# EAGLE board ultrainocopy (EAGLE 8.3.2)
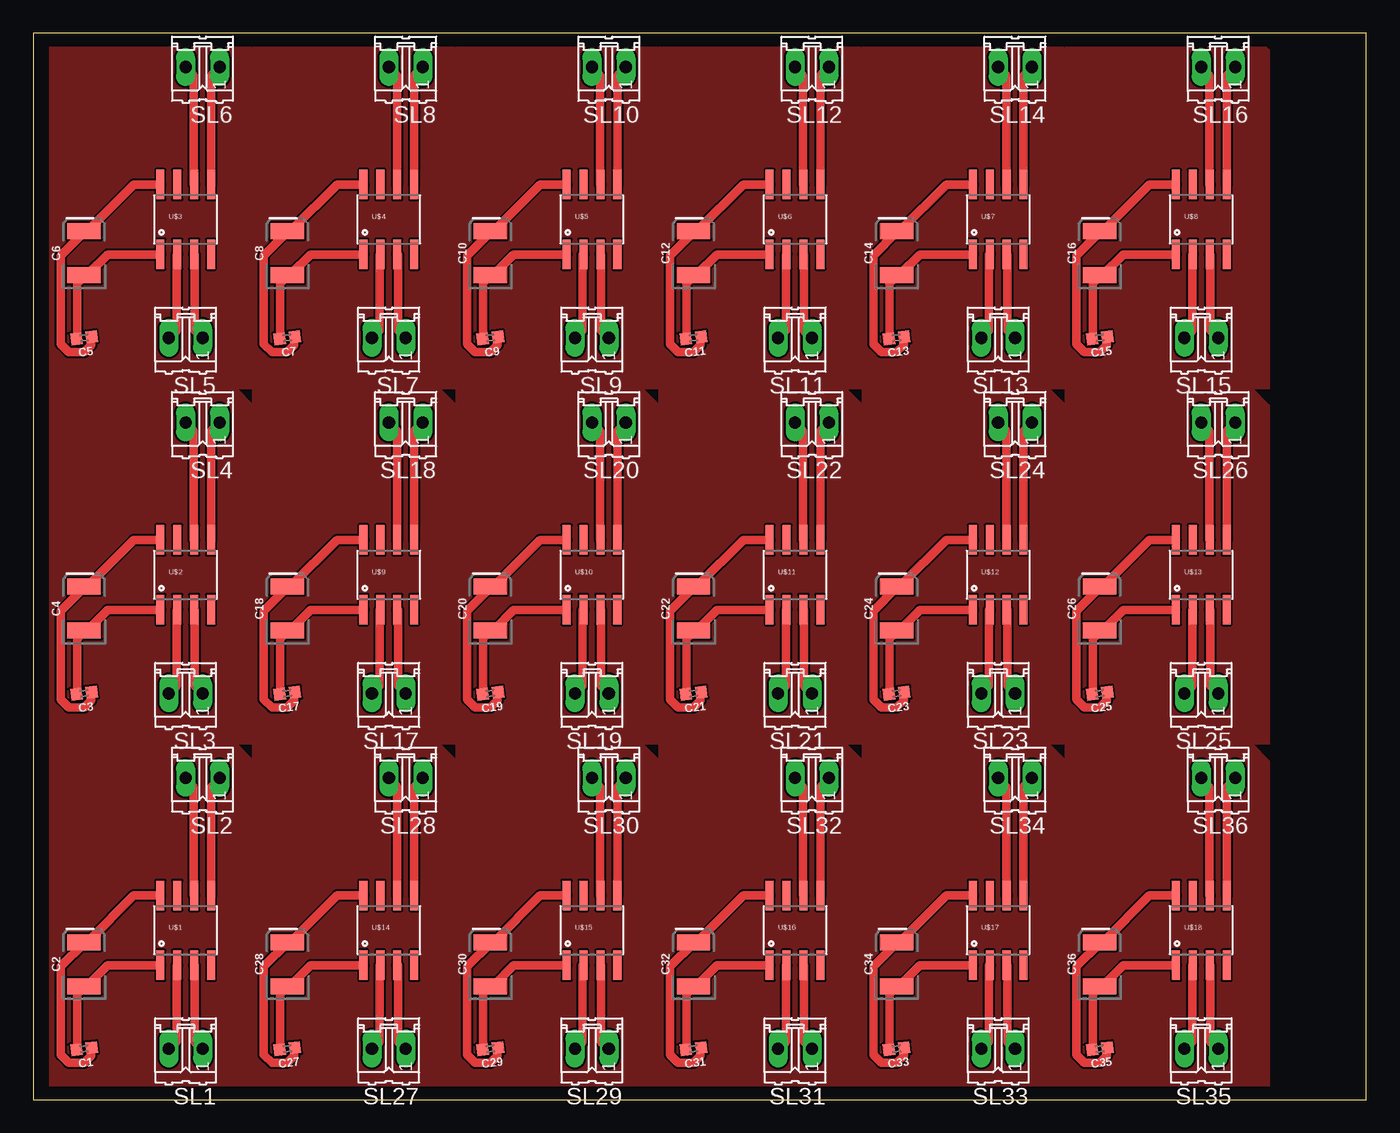
[diagram p0: board, top side]

Size 100 x 80 mm. Coordinates in mm from the lower left corner, seen from the top.
Outline: 0,0 100,0 100,80 0,80 0,0
Copper layers (1*16): Top 0.035mm / dielectric 1.5mm / Bottom 0.035mm
Design rules "default": minimum track width 6mil, minimum drill 0.35mm, track to track 6mil, track to pad 6mil, pad to pad 6mil, via to via 6mil, smd to smd 6mil, copper to edge 40mil, drill to drill 6mil, minimum pad ring 10mil, minimum via ring 8mil, stop-mask expansion 4mil, vias tented up to drill 0mil, thermal gap 10mil
Net classes: 1 GND: width 0.635 mm

## Footprints (pad centres in the part's own frame; a part is rotated, then mirrored left to right if it is on the bottom)
0402 = smd 0.85 x 0.9: 1 -0.58,0; 2 0.58,0
EIA3528 = smd 1.2 x 2.5: A 1.65,0; C -1.65,0
02P = drill 0.914 long: 1 -1.27,0; 2 1.27,0
SOIC-8 = smd 0.61 x 2.21: 1 -1.905,-2.616; 2 -0.635,-2.616; 3 0.635,-2.616; 4 1.905,-2.616; 5 1.905,2.616; 6 0.635,2.616; 7 -0.635,2.616; 8 -1.905,2.616

## Placement (x,y rotation side)
C1  0.1uF  [0402]  3.81,3.81 187.1 top
C2  47uF  [EIA3528]  3.81,10.16 90 top
C3  0.1uF  [0402]  3.81,30.48 187.1 top
C4  47uF  [EIA3528]  3.81,36.83 90 top
C5  0.1uF  [0402]  3.81,57.15 187.1 top
C6  47uF  [EIA3528]  3.81,63.5 90 top
C7  0.1uF  [0402]  19.05,57.15 187.1 top
C8  47uF  [EIA3528]  19.05,63.5 90 top
C9  0.1uF  [0402]  34.29,57.15 187.1 top
C10  47uF  [EIA3528]  34.29,63.5 90 top
C11  0.1uF  [0402]  49.53,57.15 187.1 top
C12  47uF  [EIA3528]  49.53,63.5 90 top
C13  0.1uF  [0402]  64.77,57.15 187.1 top
C14  47uF  [EIA3528]  64.77,63.5 90 top
C15  0.1uF  [0402]  80.01,57.15 187.1 top
C16  47uF  [EIA3528]  80.01,63.5 90 top
C17  0.1uF  [0402]  19.05,30.48 187.1 top
C18  47uF  [EIA3528]  19.05,36.83 90 top
C19  0.1uF  [0402]  34.29,30.48 187.1 top
C20  47uF  [EIA3528]  34.29,36.83 90 top
C21  0.1uF  [0402]  49.53,30.48 187.1 top
C22  47uF  [EIA3528]  49.53,36.83 90 top
C23  0.1uF  [0402]  64.77,30.48 187.1 top
C24  47uF  [EIA3528]  64.77,36.83 90 top
C25  0.1uF  [0402]  80.01,30.48 187.1 top
C26  47uF  [EIA3528]  80.01,36.83 90 top
C27  0.1uF  [0402]  19.05,3.81 187.1 top
C28  47uF  [EIA3528]  19.05,10.16 90 top
C29  0.1uF  [0402]  34.29,3.81 187.1 top
C30  47uF  [EIA3528]  34.29,10.16 90 top
C31  0.1uF  [0402]  49.53,3.81 187.1 top
C32  47uF  [EIA3528]  49.53,10.16 90 top
C33  0.1uF  [0402]  64.77,3.81 187.1 top
C34  47uF  [EIA3528]  64.77,10.16 90 top
C35  0.1uF  [0402]  80.01,3.81 187.1 top
C36  47uF  [EIA3528]  80.01,10.16 90 top
SL1  [02P]  11.43,3.81 180 top
SL2  [02P]  12.7,24.13 180 top
SL3  [02P]  11.43,30.48 180 top
SL4  [02P]  12.7,50.8 180 top
SL5  [02P]  11.43,57.15 180 top
SL6  [02P]  12.7,77.47 180 top
SL7  [02P]  26.67,57.15 180 top
SL8  [02P]  27.94,77.47 180 top
SL9  [02P]  41.91,57.15 180 top
SL10  [02P]  43.18,77.47 180 top
SL11  [02P]  57.15,57.15 180 top
SL12  [02P]  58.42,77.47 180 top
SL13  [02P]  72.39,57.15 180 top
SL14  [02P]  73.66,77.47 180 top
SL15  [02P]  87.63,57.15 180 top
SL16  [02P]  88.9,77.47 180 top
SL17  [02P]  26.67,30.48 180 top
SL18  [02P]  27.94,50.8 180 top
SL19  [02P]  41.91,30.48 180 top
SL20  [02P]  43.18,50.8 180 top
SL21  [02P]  57.15,30.48 180 top
SL22  [02P]  58.42,50.8 180 top
SL23  [02P]  72.39,30.48 180 top
SL24  [02P]  73.66,50.8 180 top
SL25  [02P]  87.63,30.48 180 top
SL26  [02P]  88.9,50.8 180 top
SL27  [02P]  26.67,3.81 180 top
SL28  [02P]  27.94,24.13 180 top
SL29  [02P]  41.91,3.81 180 top
SL30  [02P]  43.18,24.13 180 top
SL31  [02P]  57.15,3.81 180 top
SL32  [02P]  58.42,24.13 180 top
SL33  [02P]  72.39,3.81 180 top
SL34  [02P]  73.66,24.13 180 top
SL35  [02P]  87.63,3.81 180 top
SL36  [02P]  88.9,24.13 180 top
U$1  TC4427  [SOIC-8]  11.43,12.7 0 top
U$2  TC4427  [SOIC-8]  11.43,39.37 0 top
U$3  TC4427  [SOIC-8]  11.43,66.04 0 top
U$4  TC4427  [SOIC-8]  26.67,66.04 0 top
U$5  TC4427  [SOIC-8]  41.91,66.04 0 top
U$6  TC4427  [SOIC-8]  57.15,66.04 0 top
U$7  TC4427  [SOIC-8]  72.39,66.04 0 top
U$8  TC4427  [SOIC-8]  87.63,66.04 0 top
U$9  TC4427  [SOIC-8]  26.67,39.37 0 top
U$10  TC4427  [SOIC-8]  41.91,39.37 0 top
U$11  TC4427  [SOIC-8]  57.15,39.37 0 top
U$12  TC4427  [SOIC-8]  72.39,39.37 0 top
U$13  TC4427  [SOIC-8]  87.63,39.37 0 top
U$14  TC4427  [SOIC-8]  26.67,12.7 0 top
U$15  TC4427  [SOIC-8]  41.91,12.7 0 top
U$16  TC4427  [SOIC-8]  57.15,12.7 0 top
U$17  TC4427  [SOIC-8]  72.39,12.7 0 top
U$18  TC4427  [SOIC-8]  87.63,12.7 0 top

## Library data of the parts
C1 C3 C5 C7 C9 C11 C13 C15 C17 C19 C21 C23 C25 C27 C29 C31 C33 C35 = capacitor; PROD_ID: CAP-12416
C2 C4 C6 C8 C10 C12 C14 C16 C18 C20 C22 C24 C26 C28 C30 C32 C34 C36 = capacitor; PROD_ID: CAP-08310
SL1-SL36 = con-amp-quick; OC_FARNELL: unknown; OC_NEWARK: unknown
U$1-U$18 = example

## Nets
GND [GND]: C1.1 C2.A U$1.8
GND1 [GND]: C3.1 C4.A U$2.8
GND2 [GND]: C5.1 C6.A U$3.8
GND3 [GND]: C7.1 C8.A U$4.8
GND4 [GND]: C9.1 C10.A U$5.8
GND5 [GND]: C11.1 C12.A U$6.8
GND6 [GND]: C13.1 C14.A U$7.8
GND7 [GND]: C15.1 C16.A U$8.8
GND8 [GND]: C17.1 C18.A U$9.8
GND9 [GND]: C19.1 C20.A U$10.8
GND10 [GND]: C21.1 C22.A U$11.8
GND11 [GND]: C23.1 C24.A U$12.8
GND12 [GND]: C25.1 C26.A U$13.8
GND13 [GND]: C27.1 C28.A U$14.8
GND14 [GND]: C29.1 C30.A U$15.8
GND15 [GND]: C31.1 C32.A U$16.8
GND16 [GND]: C33.1 C34.A U$17.8
GND17 [GND]: C35.1 C36.A U$18.8
N$1 [GND]: SL1.2 U$1.2
N$2 [GND]: SL1.1 U$1.3
N$3 [GND]: SL2.1 U$1.5
N$4 [GND]: SL2.2 U$1.6
N$6 [GND]: SL3.2 U$2.2
N$7 [GND]: SL3.1 U$2.3
N$8 [GND]: SL4.1 U$2.5
N$9 [GND]: SL4.2 U$2.6
N$11 [GND]: SL5.2 U$3.2
N$12 [GND]: SL5.1 U$3.3
N$13 [GND]: SL6.1 U$3.5
N$14 [GND]: SL6.2 U$3.6
N$16 [GND]: SL7.2 U$4.2
N$17 [GND]: SL7.1 U$4.3
N$18 [GND]: SL8.1 U$4.5
N$19 [GND]: SL8.2 U$4.6
N$21 [GND]: SL9.2 U$5.2
N$22 [GND]: SL9.1 U$5.3
N$23 [GND]: SL10.1 U$5.5
N$24 [GND]: SL10.2 U$5.6
N$26 [GND]: SL11.2 U$6.2
N$27 [GND]: SL11.1 U$6.3
N$28 [GND]: SL12.1 U$6.5
N$29 [GND]: SL12.2 U$6.6
N$31 [GND]: SL13.2 U$7.2
N$32 [GND]: SL13.1 U$7.3
N$33 [GND]: SL14.1 U$7.5
N$34 [GND]: SL14.2 U$7.6
N$36 [GND]: SL15.2 U$8.2
N$37 [GND]: SL15.1 U$8.3
N$38 [GND]: SL16.1 U$8.5
N$39 [GND]: SL16.2 U$8.6
N$41 [GND]: SL17.2 U$9.2
N$42 [GND]: SL17.1 U$9.3
N$43 [GND]: SL18.1 U$9.5
N$44 [GND]: SL18.2 U$9.6
N$46 [GND]: SL19.2 U$10.2
N$47 [GND]: SL19.1 U$10.3
N$48 [GND]: SL20.1 U$10.5
N$49 [GND]: SL20.2 U$10.6
N$51 [GND]: SL21.2 U$11.2
N$52 [GND]: SL21.1 U$11.3
N$53 [GND]: SL22.1 U$11.5
N$54 [GND]: SL22.2 U$11.6
N$56 [GND]: SL23.2 U$12.2
N$57 [GND]: SL23.1 U$12.3
N$58 [GND]: SL24.1 U$12.5
N$59 [GND]: SL24.2 U$12.6
N$61 [GND]: SL25.2 U$13.2
N$62 [GND]: SL25.1 U$13.3
N$63 [GND]: SL26.1 U$13.5
N$64 [GND]: SL26.2 U$13.6
N$66 [GND]: SL27.2 U$14.2
N$67 [GND]: SL27.1 U$14.3
N$68 [GND]: SL28.1 U$14.5
N$69 [GND]: SL28.2 U$14.6
N$71 [GND]: SL29.2 U$15.2
N$72 [GND]: SL29.1 U$15.3
N$73 [GND]: SL30.1 U$15.5
N$74 [GND]: SL30.2 U$15.6
N$76 [GND]: SL31.2 U$16.2
N$77 [GND]: SL31.1 U$16.3
N$78 [GND]: SL32.1 U$16.5
N$79 [GND]: SL32.2 U$16.6
N$81 [GND]: SL33.2 U$17.2
N$82 [GND]: SL33.1 U$17.3
N$83 [GND]: SL34.1 U$17.5
N$84 [GND]: SL34.2 U$17.6
N$86 [GND]: SL35.2 U$18.2
N$87 [GND]: SL35.1 U$18.3
N$88 [GND]: SL36.1 U$18.5
N$89 [GND]: SL36.2 U$18.6
VCC [GND]: C1.2 C2.C U$1.1
VCC1 [GND]: C3.2 C4.C U$2.1
VCC2 [GND]: C5.2 C6.C U$3.1
VCC3 [GND]: C7.2 C8.C U$4.1
VCC4 [GND]: C9.2 C10.C U$5.1
VCC5 [GND]: C11.2 C12.C U$6.1
VCC6 [GND]: C13.2 C14.C U$7.1
VCC7 [GND]: C15.2 C16.C U$8.1
VCC8 [GND]: C17.2 C18.C U$9.1
VCC9 [GND]: C19.2 C20.C U$10.1
VCC10 [GND]: C21.2 C22.C U$11.1
VCC11 [GND]: C23.2 C24.C U$12.1
VCC12 [GND]: C25.2 C26.C U$13.1
VCC13 [GND]: C27.2 C28.C U$14.1
VCC14 [GND]: C29.2 C30.C U$15.1
VCC15 [GND]: C31.2 C32.C U$16.1
VCC16 [GND]: C33.2 C34.C U$17.1
VCC17 [GND]: C35.2 C36.C U$18.1

## Tracks (layer width: path | path; a pad name or v marks a point on that pad's centre or on a via)
GND
  Top 0.635: C1.1 4.34,3.81 4.34,3.28 3.81,2.74 2.67,2.74 2.06,3.35 2.06,9.98 3.81,11.73 C2.A 4.12,11.89 7.54,15.32 U$1.8
GND1
  Top 0.635: C3.1 4.34,30.48 4.34,29.95 3.81,29.41 2.67,29.41 2.06,30.02 2.06,36.65 3.81,38.41 C4.A 4.12,38.56 7.54,41.99 U$2.8
GND2
  Top 0.635: C5.1 4.34,57.15 4.34,56.62 3.81,56.08 2.67,56.08 2.06,56.69 2.06,63.32 3.81,65.08 C6.A 4.12,65.23 7.54,68.66 U$3.8
GND3
  Top 0.635: C7.1 19.58,57.15 19.58,56.62 19.05,56.08 17.91,56.08 17.3,56.69 17.3,63.32 19.05,65.08 C8.A 19.36,65.23 22.78,68.66 U$4.8
GND4
  Top 0.635: C9.1 34.82,57.15 34.82,56.62 34.29,56.08 33.15,56.08 32.54,56.69 32.54,63.32 34.29,65.08 C10.A 34.59,65.23 38.02,68.66 U$5.8
GND5
  Top 0.635: C11.1 50.06,57.15 50.06,56.62 49.53,56.08 48.39,56.08 47.78,56.69 47.78,63.32 49.53,65.08 C12.A 49.84,65.23 53.26,68.66 U$6.8
GND6
  Top 0.635: C13.1 65.3,57.15 65.3,56.62 64.77,56.08 63.63,56.08 63.02,56.69 63.02,63.32 64.77,65.08 C14.A 65.08,65.23 68.5,68.66 U$7.8
GND7
  Top 0.635: C15.1 80.54,57.15 80.54,56.62 80.01,56.08 78.87,56.08 78.26,56.69 78.26,63.32 80.01,65.08 C16.A 80.31,65.23 83.74,68.66 U$8.8
GND8
  Top 0.635: C17.1 19.58,30.48 19.58,29.95 19.05,29.41 17.91,29.41 17.3,30.02 17.3,36.65 19.05,38.41 C18.A 19.36,38.56 22.78,41.99 U$9.8
GND9
  Top 0.635: C19.1 34.82,30.48 34.82,29.95 34.29,29.41 33.15,29.41 32.54,30.02 32.54,36.65 34.29,38.41 C20.A 34.59,38.56 38.02,41.99 U$10.8
GND10
  Top 0.635: C21.1 50.06,30.48 50.06,29.95 49.53,29.41 48.39,29.41 47.78,30.02 47.78,36.65 49.53,38.41 C22.A 49.84,38.56 53.26,41.99 U$11.8
GND11
  Top 0.635: C23.1 65.3,30.48 65.3,29.95 64.77,29.41 63.63,29.41 63.02,30.02 63.02,36.65 64.77,38.41 C24.A 65.08,38.56 68.5,41.99 U$12.8
GND12
  Top 0.635: C25.1 80.54,30.48 80.54,29.95 80.01,29.41 78.87,29.41 78.26,30.02 78.26,36.65 80.01,38.41 C26.A 80.31,38.56 83.74,41.99 U$13.8
GND13
  Top 0.635: C27.1 19.58,3.81 19.58,3.28 19.05,2.74 17.91,2.74 17.3,3.35 17.3,9.98 19.05,11.73 C28.A 19.36,11.89 22.78,15.32 U$14.8
GND14
  Top 0.635: C29.1 34.82,3.81 34.82,3.28 34.29,2.74 33.15,2.74 32.54,3.35 32.54,9.98 34.29,11.73 C30.A 34.59,11.89 38.02,15.32 U$15.8
GND15
  Top 0.635: C31.1 50.06,3.81 50.06,3.28 49.53,2.74 48.39,2.74 47.78,3.35 47.78,9.98 49.53,11.73 C32.A 49.84,11.89 53.26,15.32 U$16.8
GND16
  Top 0.635: C33.1 65.3,3.81 65.3,3.28 64.77,2.74 63.63,2.74 63.02,3.35 63.02,9.98 64.77,11.73 C34.A 65.08,11.89 68.5,15.32 U$17.8
GND17
  Top 0.635: C35.1 80.54,3.81 80.54,3.28 80.01,2.74 78.87,2.74 78.26,3.35 78.26,9.98 80.01,11.73 C36.A 80.31,11.89 83.74,15.32 U$18.8
N$1
  Top 0.635: U$1.2 10.74,10.06 10.74,4.34 10.21,3.81 SL1.2
N$2
  Top 0.635: U$1.3 12.12,10.06 12.12,4.34 12.65,3.81 SL1.1
N$3
  Top 0.635: U$1.5 13.34,23.47 13.95,24.08 SL2.1
N$4
  Top 0.635: U$1.6 12.04,15.32 12.04,23.47 11.43,24.08 SL2.2
N$5
  pour Top: 1.27,26.67 15.24,26.67 16.51,25.4 16.51,0 1.27,0 1.27,25.4
N$6
  Top 0.635: U$2.2 10.74,36.73 10.74,31.01 10.21,30.48 SL3.2
N$7
  Top 0.635: U$2.3 12.12,36.73 12.12,31.01 12.65,30.48 SL3.1
N$8
  Top 0.635: U$2.5 13.34,50.14 13.95,50.75 SL4.1
N$9
  Top 0.635: U$2.6 12.04,41.99 12.04,50.14 11.43,50.75 SL4.2
N$10
  pour Top: 1.27,53.34 15.24,53.34 16.51,52.07 16.51,26.67 1.27,26.67 1.27,52.07
N$11
  Top 0.635: U$3.2 10.74,63.4 10.74,57.68 10.21,57.15 SL5.2
N$12
  Top 0.635: U$3.3 12.12,63.4 12.12,57.68 12.65,57.15 SL5.1
N$13
  Top 0.635: U$3.5 13.34,76.81 13.95,77.42 SL6.1
N$14
  Top 0.635: U$3.6 12.04,68.66 12.04,76.81 11.43,77.42 SL6.2
N$15
  pour Top: 1.27,80.01 15.24,80.01 16.51,78.74 16.51,53.34 1.27,53.34 1.27,78.74
N$16
  Top 0.635: U$4.2 25.98,63.4 25.98,57.68 25.45,57.15 SL7.2
N$17
  Top 0.635: U$4.3 27.36,63.4 27.36,57.68 27.89,57.15 SL7.1
N$18
  Top 0.635: U$4.5 28.57,76.81 29.18,77.42 SL8.1
N$19
  Top 0.635: U$4.6 27.28,68.66 27.28,76.81 26.67,77.42 SL8.2
N$20
  pour Top: 16.51,80.01 30.48,80.01 31.75,78.74 31.75,53.34 16.51,53.34 16.51,78.74
N$21
  Top 0.635: U$5.2 41.22,63.4 41.22,57.68 40.69,57.15 SL9.2
N$22
  Top 0.635: U$5.3 42.6,63.4 42.6,57.68 43.13,57.15 SL9.1
N$23
  Top 0.635: U$5.5 43.81,76.81 44.42,77.42 SL10.1
N$24
  Top 0.635: U$5.6 42.52,68.66 42.52,76.81 41.91,77.42 SL10.2
N$25
  pour Top: 31.75,80.01 45.72,80.01 46.99,78.74 46.99,53.34 31.75,53.34 31.75,78.74
N$26
  Top 0.635: U$6.2 56.46,63.4 56.46,57.68 55.93,57.15 SL11.2
N$27
  Top 0.635: U$6.3 57.84,63.4 57.84,57.68 58.37,57.15 SL11.1
N$28
  Top 0.635: U$6.5 59.05,76.81 59.66,77.42 SL12.1
N$29
  Top 0.635: U$6.6 57.76,68.66 57.76,76.81 57.15,77.42 SL12.2
N$30
  pour Top: 46.99,80.01 60.96,80.01 62.23,78.74 62.23,53.34 46.99,53.34 46.99,78.74
N$31
  Top 0.635: U$7.2 71.7,63.4 71.7,57.68 71.17,57.15 SL13.2
N$32
  Top 0.635: U$7.3 73.08,63.4 73.08,57.68 73.61,57.15 SL13.1
N$33
  Top 0.635: U$7.5 74.3,76.81 74.91,77.42 SL14.1
N$34
  Top 0.635: U$7.6 73,68.66 73,76.81 72.39,77.42 SL14.2
N$35
  pour Top: 62.23,80.01 76.2,80.01 77.47,78.74 77.47,53.34 62.23,53.34 62.23,78.74
N$36
  Top 0.635: U$8.2 86.94,63.4 86.94,57.68 86.41,57.15 SL15.2
N$37
  Top 0.635: U$8.3 88.32,63.4 88.32,57.68 88.85,57.15 SL15.1
N$38
  Top 0.635: U$8.5 89.53,76.81 90.14,77.42 SL16.1
N$39
  Top 0.635: U$8.6 88.24,68.66 88.24,76.81 87.63,77.42 SL16.2
N$40
  pour Top: 77.47,80.01 91.44,80.01 92.71,78.74 92.71,53.34 77.47,53.34 77.47,78.74
N$41
  Top 0.635: U$9.2 25.98,36.73 25.98,31.01 25.45,30.48 SL17.2
N$42
  Top 0.635: U$9.3 27.36,36.73 27.36,31.01 27.89,30.48 SL17.1
N$43
  Top 0.635: U$9.5 28.57,50.14 29.18,50.75 SL18.1
N$44
  Top 0.635: U$9.6 27.28,41.99 27.28,50.14 26.67,50.75 SL18.2
N$45
  pour Top: 16.51,53.34 30.48,53.34 31.75,52.07 31.75,26.67 16.51,26.67 16.51,52.07
N$46
  Top 0.635: U$10.2 41.22,36.73 41.22,31.01 40.69,30.48 SL19.2
N$47
  Top 0.635: U$10.3 42.6,36.73 42.6,31.01 43.13,30.48 SL19.1
N$48
  Top 0.635: U$10.5 43.81,50.14 44.42,50.75 SL20.1
N$49
  Top 0.635: U$10.6 42.52,41.99 42.52,50.14 41.91,50.75 SL20.2
N$50
  pour Top: 31.75,53.34 45.72,53.34 46.99,52.07 46.99,26.67 31.75,26.67 31.75,52.07
N$51
  Top 0.635: U$11.2 56.46,36.73 56.46,31.01 55.93,30.48 SL21.2
N$52
  Top 0.635: U$11.3 57.84,36.73 57.84,31.01 58.37,30.48 SL21.1
N$53
  Top 0.635: U$11.5 59.05,50.14 59.66,50.75 SL22.1
N$54
  Top 0.635: U$11.6 57.76,41.99 57.76,50.14 57.15,50.75 SL22.2
N$55
  pour Top: 46.99,53.34 60.96,53.34 62.23,52.07 62.23,26.67 46.99,26.67 46.99,52.07
N$56
  Top 0.635: U$12.2 71.7,36.73 71.7,31.01 71.17,30.48 SL23.2
N$57
  Top 0.635: U$12.3 73.08,36.73 73.08,31.01 73.61,30.48 SL23.1
N$58
  Top 0.635: U$12.5 74.3,50.14 74.91,50.75 SL24.1
N$59
  Top 0.635: U$12.6 73,41.99 73,50.14 72.39,50.75 SL24.2
N$60
  pour Top: 62.23,53.34 76.2,53.34 77.47,52.07 77.47,26.67 62.23,26.67 62.23,52.07
N$61
  Top 0.635: U$13.2 86.94,36.73 86.94,31.01 86.41,30.48 SL25.2
N$62
  Top 0.635: U$13.3 88.32,36.73 88.32,31.01 88.85,30.48 SL25.1
N$63
  Top 0.635: U$13.5 89.53,50.14 90.14,50.75 SL26.1
N$64
  Top 0.635: U$13.6 88.24,41.99 88.24,50.14 87.63,50.75 SL26.2
N$65
  pour Top: 77.47,53.34 91.44,53.34 92.71,52.07 92.71,26.67 77.47,26.67 77.47,52.07
N$66
  Top 0.635: U$14.2 25.98,10.06 25.98,4.34 25.45,3.81 SL27.2
N$67
  Top 0.635: U$14.3 27.36,10.06 27.36,4.34 27.89,3.81 SL27.1
N$68
  Top 0.635: U$14.5 28.57,23.47 29.18,24.08 SL28.1
N$69
  Top 0.635: U$14.6 27.28,15.32 27.28,23.47 26.67,24.08 SL28.2
N$70
  pour Top: 16.51,26.67 30.48,26.67 31.75,25.4 31.75,0 16.51,0 16.51,25.4
N$71
  Top 0.635: U$15.2 41.22,10.06 41.22,4.34 40.69,3.81 SL29.2
N$72
  Top 0.635: U$15.3 42.6,10.06 42.6,4.34 43.13,3.81 SL29.1
N$73
  Top 0.635: U$15.5 43.81,23.47 44.42,24.08 SL30.1
N$74
  Top 0.635: U$15.6 42.52,15.32 42.52,23.47 41.91,24.08 SL30.2
N$75
  pour Top: 31.75,26.67 45.72,26.67 46.99,25.4 46.99,0 31.75,0 31.75,25.4
N$76
  Top 0.635: U$16.2 56.46,10.06 56.46,4.34 55.93,3.81 SL31.2
N$77
  Top 0.635: U$16.3 57.84,10.06 57.84,4.34 58.37,3.81 SL31.1
N$78
  Top 0.635: U$16.5 59.05,23.47 59.66,24.08 SL32.1
N$79
  Top 0.635: U$16.6 57.76,15.32 57.76,23.47 57.15,24.08 SL32.2
N$80
  pour Top: 46.99,26.67 60.96,26.67 62.23,25.4 62.23,0 46.99,0 46.99,25.4
N$81
  Top 0.635: U$17.2 71.7,10.06 71.7,4.34 71.17,3.81 SL33.2
N$82
  Top 0.635: U$17.3 73.08,10.06 73.08,4.34 73.61,3.81 SL33.1
N$83
  Top 0.635: U$17.5 74.3,23.47 74.91,24.08 SL34.1
N$84
  Top 0.635: U$17.6 73,15.32 73,23.47 72.39,24.08 SL34.2
N$85
  pour Top: 62.23,26.67 76.2,26.67 77.47,25.4 77.47,0 62.23,0 62.23,25.4
N$86
  Top 0.635: U$18.2 86.94,10.06 86.94,4.34 86.41,3.81 SL35.2
N$87
  Top 0.635: U$18.3 88.32,10.06 88.32,4.34 88.85,3.81 SL35.1
N$88
  Top 0.635: U$18.5 89.53,23.47 90.14,24.08 SL36.1
N$89
  Top 0.635: U$18.6 88.24,15.32 88.24,23.47 87.63,24.08 SL36.2
N$90
  pour Top: 77.47,26.67 91.44,26.67 92.71,25.4 92.71,0 77.47,0 77.47,25.4
VCC
  Top 0.635: C1.2 3.28,3.81 3.28,7.92 3.81,8.46 C2.C 4.12,8.61 5.56,10.06 9.53,10.06 U$1.1
VCC1
  Top 0.635: C3.2 3.28,30.48 3.28,34.59 3.81,35.13 C4.C 4.12,35.28 5.56,36.73 9.53,36.73 U$2.1
VCC2
  Top 0.635: C5.2 3.28,57.15 3.28,61.27 3.81,61.8 C6.C 4.12,61.95 5.56,63.4 9.53,63.4 U$3.1
VCC3
  Top 0.635: C7.2 18.52,57.15 18.52,61.27 19.05,61.8 C8.C 19.36,61.95 20.8,63.4 24.77,63.4 U$4.1
VCC4
  Top 0.635: C9.2 33.76,57.15 33.76,61.27 34.29,61.8 C10.C 34.59,61.95 36.04,63.4 40.01,63.4 U$5.1
VCC5
  Top 0.635: C11.2 49,57.15 49,61.27 49.53,61.8 C12.C 49.84,61.95 51.28,63.4 55.24,63.4 U$6.1
VCC6
  Top 0.635: C13.2 64.24,57.15 64.24,61.27 64.77,61.8 C14.C 65.08,61.95 66.52,63.4 70.48,63.4 U$7.1
VCC7
  Top 0.635: C15.2 79.48,57.15 79.48,61.27 80.01,61.8 C16.C 80.31,61.95 81.76,63.4 85.72,63.4 U$8.1
VCC8
  Top 0.635: C17.2 18.52,30.48 18.52,34.59 19.05,35.13 C18.C 19.36,35.28 20.8,36.73 24.77,36.73 U$9.1
VCC9
  Top 0.635: C19.2 33.76,30.48 33.76,34.59 34.29,35.13 C20.C 34.59,35.28 36.04,36.73 40.01,36.73 U$10.1
VCC10
  Top 0.635: C21.2 49,30.48 49,34.59 49.53,35.13 C22.C 49.84,35.28 51.28,36.73 55.24,36.73 U$11.1
VCC11
  Top 0.635: C23.2 64.24,30.48 64.24,34.59 64.77,35.13 C24.C 65.08,35.28 66.52,36.73 70.48,36.73 U$12.1
VCC12
  Top 0.635: C25.2 79.48,30.48 79.48,34.59 80.01,35.13 C26.C 80.31,35.28 81.76,36.73 85.72,36.73 U$13.1
VCC13
  Top 0.635: C27.2 18.52,3.81 18.52,7.92 19.05,8.46 C28.C 19.36,8.61 20.8,10.06 24.77,10.06 U$14.1
VCC14
  Top 0.635: C29.2 33.76,3.81 33.76,7.92 34.29,8.46 C30.C 34.59,8.61 36.04,10.06 40.01,10.06 U$15.1
VCC15
  Top 0.635: C31.2 49,3.81 49,7.92 49.53,8.46 C32.C 49.84,8.61 51.28,10.06 55.24,10.06 U$16.1
VCC16
  Top 0.635: C33.2 64.24,3.81 64.24,7.92 64.77,8.46 C34.C 65.08,8.61 66.52,10.06 70.48,10.06 U$17.1
VCC17
  Top 0.635: C35.2 79.48,3.81 79.48,7.92 80.01,8.46 C36.C 80.31,8.61 81.76,10.06 85.72,10.06 U$18.1